# Altium PCB Assessment_2_PCB.PcbDoc (part 1 of 2)
Units mil, origin at the board's own origin, x right, y up, seen from the top; angles counter-clockwise.
Board outline 3937.01 x 2755.91 mil, 2 copper layers (Top Layer, Bottom Layer); 59 components, 57 nets, 310 pads, 181 vias.
Unrouted connection lines stored in the file: 6.
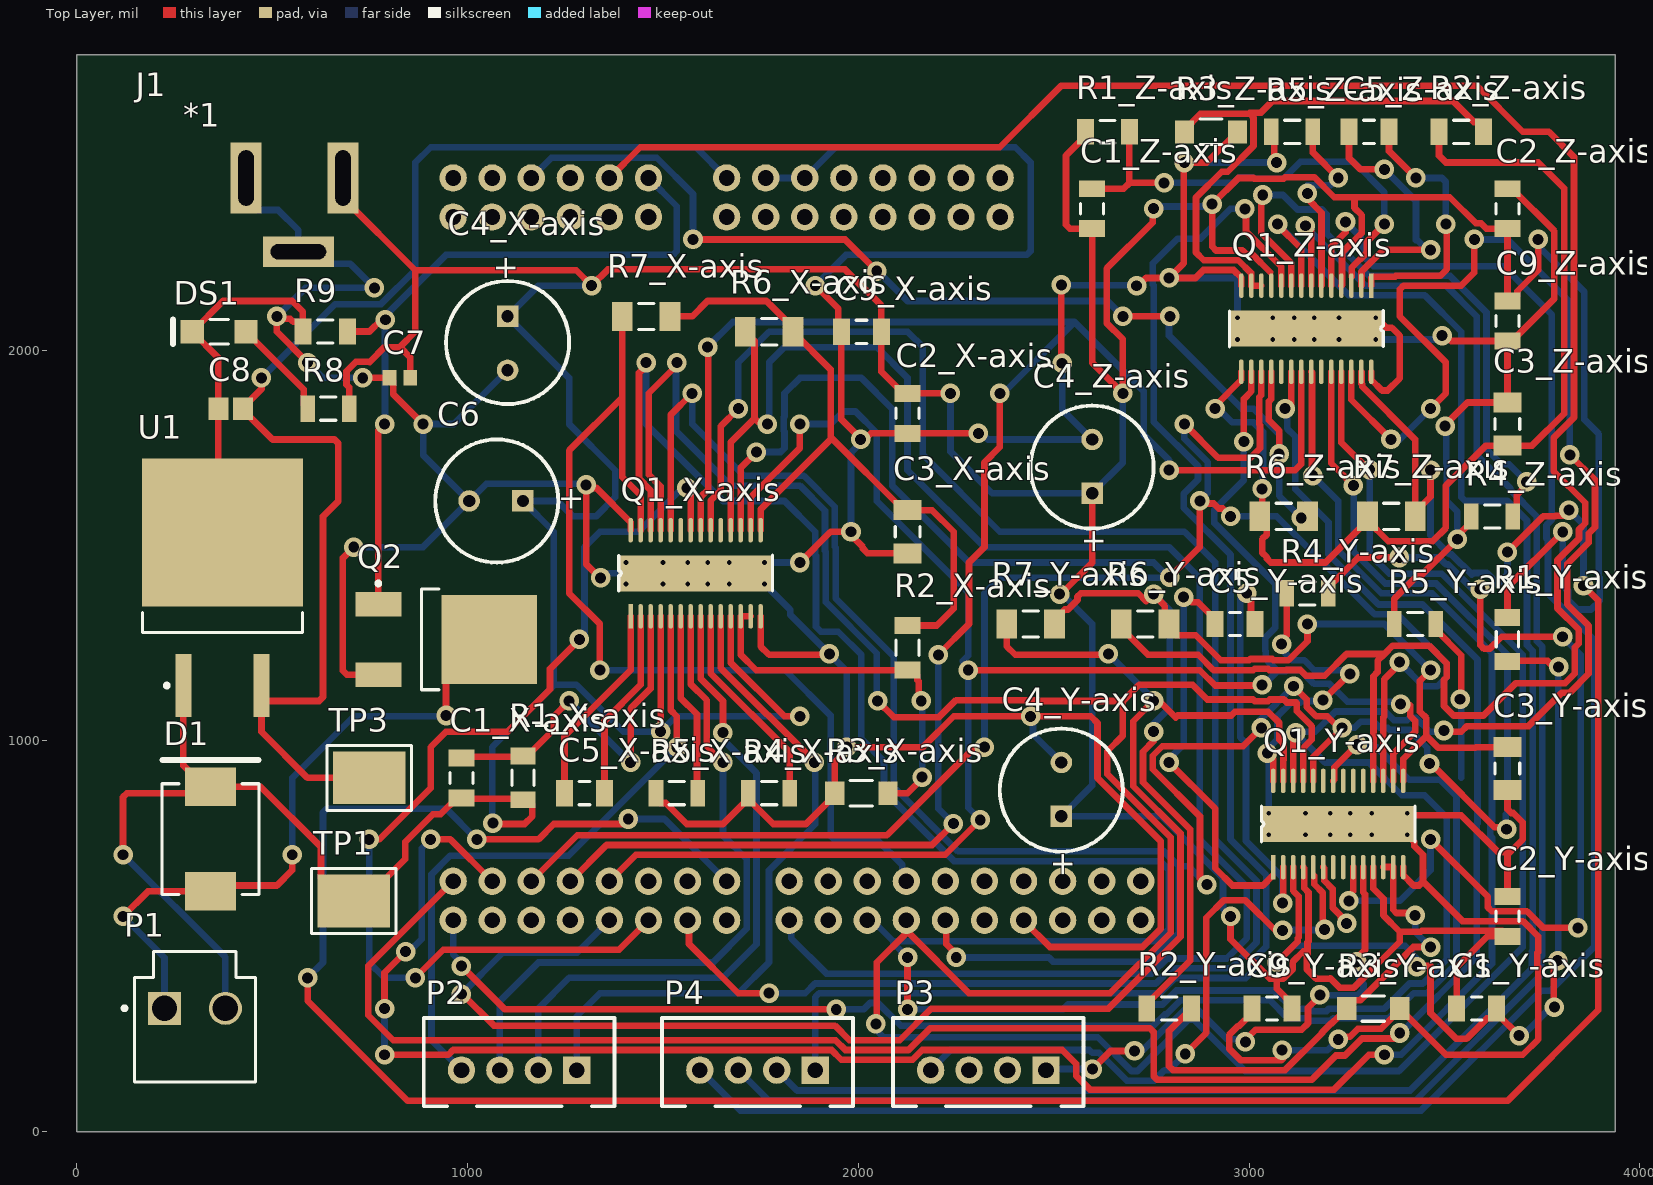
[diagram p0: Top Layer view]
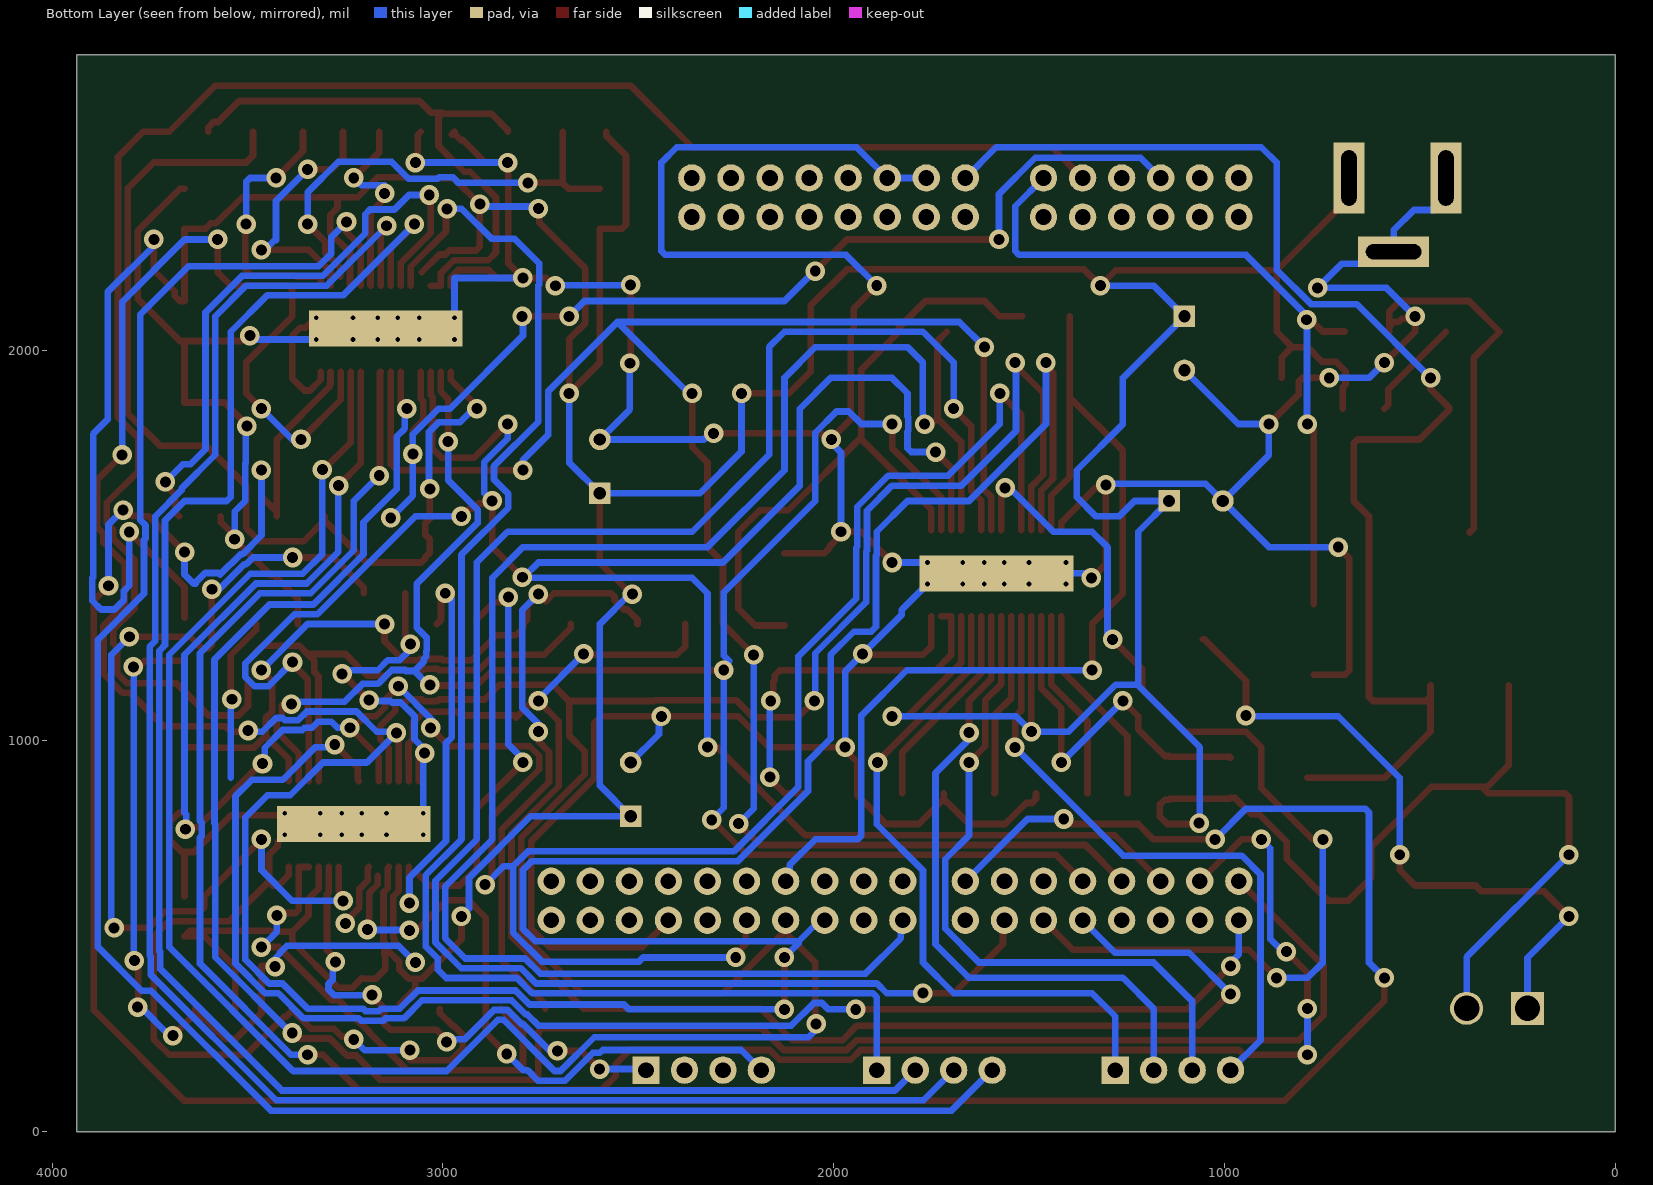
[diagram p1: Bottom Layer view, seen from below]

## Layer stack, top to bottom
Top Solder: solder mask 0.4, Solder Resist, Dk 3.5
Top Layer: signal copper 1.4
Dielectric 1: dielectric 12.6, FR-4, Dk 4.8
Bottom Layer: signal copper 1.4
Bottom Solder: solder mask 0.4, Solder Resist, Dk 3.5

## Board outline
0,0 0,2755.91 3937.01,2755.91 3937.01,0

## Design rules (kind name [scope] priority, off if disabled: settings)
Clearance [All] p1: gap=8 ignorepadtopadclearanceinfootprint=FALSE
HoleSize [All] p1: absolutevalues=TRUE maxlimit=150 minlimit=12.01 maxpercent=80.000 minpercent=20.000
PlaneClearance [All] p1: clearance=10
PolygonConnect [All] p1: connectstyle=Relief reliefconductorwidth=10 reliefentries=4 polygonreliefangle="90 Angle" airgapwidth=10
RoutingVias [All] p1: holewidth=28 width=50 viastyle="Through Hole" minholewidth=28 minwidth=50 maxholewidth=28 maxwidth=50
SolderMaskExpansion [All] p1: expansion=4 istentingtop=FALSE
Width [All] p1: maxlimit=70.87 minlimit=8 preferedwidth=10
28 further rules are at their usual default settings.

## Classes and differential pairs
channel class Stepper_Motor_IC_Circuit: X-axis Y-axis Z-axis
component class Z-axis: C1_Z-axis C2_Z-axis C3_Z-axis C4_Z-axis C5_Z-axis C9_Z-axis Q1_Z-axis R1_Z-axis R2_Z-axis R3_Z-axis R4_Z-axis R5_Z-axis R6_Z-axis R7_Z-axis
component class Y-axis: C1_Y-axis C2_Y-axis C3_Y-axis C4_Y-axis C5_Y-axis C9_Y-axis Q1_Y-axis R1_Y-axis R2_Y-axis R3_Y-axis R4_Y-axis R5_Y-axis R6_Y-axis R7_Y-axis
component class X-axis: C1_X-axis C2_X-axis C3_X-axis C4_X-axis C5_X-axis C9_X-axis Q1_X-axis R1_X-axis R2_X-axis R3_X-axis R4_X-axis R5_X-axis R6_X-axis R7_X-axis
component class Sheet_Symbol_Circuit: P2 P3 P4
component class "P_S & R": C6 C7 C8 DS1 J1 R8 TP1 TP3 U1
component class M_B_S_C: D1 P1 Q2 R9
component class K22F: *1

## Components (designator, comment, footprint, x,y, rotation, side; value= is the part's Value field where it differs from the comment)
*1 "*" FRDM-K22F 3462.99,2540.94 r180 top
C1_X-axis "C1206C103K5RACTU" KEMT-1206-2_L 984.25,905.51 r270 top (schematic designator C1)
C1_Y-axis "C1206C103K5RACTU" KEMT-1206-2_L 3582.68,314.96 r180 top (schematic designator C1)
C1_Z-axis "C1206C103K5RACTU" KEMT-1206-2_L 2598.43,2362.2 r270 top (schematic designator C1)
C2_X-axis "C1206C103K5RACTU" KEMT-1206-2_L 2125.98,1838.58 r270 top (schematic designator C2)
C2_Y-axis "C1206C103K5RACTU" KEMT-1206-2_L 3661.42,551.18 r90 top (schematic designator C2)
C2_Z-axis "C1206C103K5RACTU" KEMT-1206-2_L 3661.42,2362.2 r90 top (schematic designator C2)
C3_X-axis "1206C474K5RACTU" CAPC3216X100X50NL20T25 2125.98,1535.43 r270 top (schematic designator C3)
C3_Y-axis "1206C474K5RACTU" CAPC3216X100X50NL20T25 3661.42,929.13 r270 top (schematic designator C3)
C3_Z-axis "1206C474K5RACTU" CAPC3216X100X50NL20T25 3661.42,1811.02 r90 top (schematic designator C3)
C4_X-axis "100uF, 50V" "Capacitor radial 8mm" 1102.36,2086.61 r270 top (schematic designator C4)
C4_Y-axis "100uF, 50V" "Capacitor radial 8mm" 2519.68,807.09 r90 top (schematic designator C4)
C4_Z-axis "100uF, 50V" "Capacitor radial 8mm" 2598.43,1633.86 r90 top (schematic designator C4)
C5_X-axis "C1206C103K5RACTU" KEMT-1206-2_L 1299.21,866.14 r180 top (schematic designator C5)
C5_Y-axis "C1206C103K5RACTU" KEMT-1206-2_L 2964.57,1299.21 r180 top (schematic designator C5)
C5_Z-axis "C1206C103K5RACTU" KEMT-1206-2_L 3307.09,2559.06 r0 top (schematic designator C5)
C6 "100uF, 50V" "Capacitor radial 8mm" 1141.73,1614.17 r180 top
C7 "330nF" CAPC1608X87X35NL15T15 826.77,1929.13 r0 top
C8 "100nF" CAPC2013X88X50NL20T25 393.7,1850.39 r0 top
C9_X-axis "C1206C103K5RACTU" KEMT-1206-2_L 2007.87,2047.24 r180 top (schematic designator C9)
C9_Y-axis "C1206C103K5RACTU" KEMT-1206-2_L 3059.06,314.96 r180 top (schematic designator C9)
C9_Z-axis "C1206C103K5RACTU" KEMT-1206-2_L 3661.42,2074.8 r270 top (schematic designator C9)
D1 "S5BC-13-F" DIOD-S5xC_V 342.28,748.78 r90 top
DS1 "HSMH-C150" AVAG-HSMX-C150_V 364.17,2047.24 r180 top
J1 "Barrel Jack 5.5x2.1mm" "Barrel Jack 2.1x5.5mm THT" 141.73,2440.94 r270 top
P1 "B2P-VH(LF)(SN)" JST-B2P-VH(LF)(SN)_V 302.13,260.59 r0 top
P2 "B4B-XH-A (LF)(SN)" "B4B-XH-A (LF)(SN)" 1279.53,157.48 r180 top
P3 "B4B-XH-A (LF)(SN)" "B4B-XH-A (LF)(SN)" 2480.32,157.48 r180 top
P4 "B4B-XH-A (LF)(SN)" "B4B-XH-A (LF)(SN)" 1889.76,157.48 r180 top
Q1_X-axis "DRV8825" "DRV8825 HTSSOP"#1 1417.32,1318.9 r90 top (schematic designator Q1)
Q1_Y-axis "DRV8825" "DRV8825 HTSSOP"#2 3062.01,677.17 r90 top (schematic designator Q1)
Q1_Z-axis "DRV8825" "DRV8825 HTSSOP"#2 3312.99,2165.35 r270 top (schematic designator Q1)
Q2 "NTD6415ANLT4G" ONSC-DPAK-3-369AA-01_V 944.88,1259.84 r0 top
R1_X-axis "ERJ-8ENF1004V" RESC3216X70X50NL05T20 1141.73,905.51 r270 top (schematic designator R1)
R1_Y-axis "ERJ-8ENF1004V" RESC3216X70X50NL05T20 3661.42,1259.84 r90 top (schematic designator R1)
R1_Z-axis "ERJ-8ENF1004V" RESC3216X70X50NL05T20 2637.8,2559.06 r180 top (schematic designator R1)
R2_X-axis "51k R" RESC3216X60X45NL10T20 2125.98,1238.19 r90 top (schematic designator R2)
R2_Y-axis "51k R" RESC3216X60X45NL10T20 2795.28,314.96 r180 top (schematic designator R2)
R2_Z-axis "51k R" RESC3216X60X45NL10T20 3543.31,2559.06 r180 top (schematic designator R2)
R3_X-axis "CR1206-FX-3002ELF" FP-CR1206-MFG#1 2007.87,866.14 r0 top (schematic designator R3)
R3_Y-axis "CR1206-FX-3002ELF" FP-CR1206-MFG#2 3317.91,314.96 r180 top (schematic designator R3)
R3_Z-axis "CR1206-FX-3002ELF" FP-CR1206-MFG#2 2902.56,2559.06 r180 top (schematic designator R3)
R4_X-axis "0.2R 5% 1206(3216)" RESC1206(3216)_L 1771.65,866.14 r180 top value=0.2R (schematic designator R4)
R4_Y-axis "0.2R 5% 1206(3216)" RESC1206(3216)_L 3149.61,1377.95 r180 top value=0.2R (schematic designator R4)
R4_Z-axis "0.2R 5% 1206(3216)" RESC1206(3216)_L 3622.05,1574.8 r180 top value=0.2R (schematic designator R4)
R5_X-axis "0.2R 5% 1206(3216)" RESC1206(3216)_L 1535.43,866.14 r180 top value=0.2R (schematic designator R5)
R5_Y-axis "0.2R 5% 1206(3216)" RESC1206(3216)_L 3425.2,1299.21 r180 top value=0.2R (schematic designator R5)
R5_Z-axis "0.2R 5% 1206(3216)" RESC1206(3216)_L 3110.24,2559.06 r180 top value=0.2R (schematic designator R5)
R6_X-axis "10K 5% 1206(3216)" RESC1206(3216)_M 1771.65,2047.24 r180 top value=10kR (schematic designator R6)
R6_Y-axis "10K 5% 1206(3216)" RESC1206(3216)_M 2734.25,1299.21 r180 top value=10kR (schematic designator R6)
R6_Z-axis "10K 5% 1206(3216)" RESC1206(3216)_M 3088.58,1574.8 r0 top value=10kR (schematic designator R6)
R7_X-axis "10K 5% 1206(3216)" RESC1206(3216)_M 1456.69,2086.61 r180 top value=10kR (schematic designator R7)
R7_Y-axis "10K 5% 1206(3216)" RESC1206(3216)_M 2440.94,1299.21 r180 top value=10kR (schematic designator R7)
R7_Z-axis "10K 5% 1206(3216)" RESC1206(3216)_M 3364.17,1574.8 r0 top value=10kR (schematic designator R7)
R8 "560R 5% 1206(3216)" RESC1206(3216)_L 643.7,1850.39 r0 top value=560R
R9 "51kR" RESC3216X60X45NL10T20 635.59,2047.99 r0 top
TP1 "5016" KEYSTONE-5016_V 708.66,590.55 r0 top
TP3 "5016" KEYSTONE-5016_V 748.03,905.51 r0 top
U1 "L7805CD2T-TR" TO-263_M 372.44,1391.73 r90 top

## Footprints (in the part's own frame and the unit in brackets; to place one, negate y for a bottom-side part, rotate by r counter-clockwise, add the part's x,y. Pads: shape width x height; smd on the part's side, far side on the other; paste and mask are expansions set on the pad)
AVAG-HSMX-C150_V [mm] "SMD, 2-Leads, Body 3.2x1.6mm"
  rect 1.5x1.5 smd: 1(-1.75,0) 2(1.75,0)
  silkscreen extent -0.6,-0.8 3,0.8, body extent -1.6,-0.8 1.6,0.8, height 1.1
"B4B-XH-A (LF)(SN)" [mil] "B4B-XH-A (LF)(SN) Wire-To-Board Connector, Vertical, 2.5 mm, 4 Contacts"
  rect 70x70 hole 40: 1(0,0)
  round 70 hole 40: 2(98.43,0) 3(196.85,0) 4(295.28,0)
  silkscreen extent -96,-134 392,93, body extent -97,-134 391,92, height 276
"Barrel Jack 2.1x5.5mm THT" [mm] "GCT DCJ200-10-A-K1-K"
  rect 4.6x2 hole 1 slot 3.6 at 0 deg: 1(0,13.7) 2(0,7.4)
  rect 2x4.6 hole 1 slot 3.6 at 90 deg: 2(4.8,10.8)
  body extent -4.47,0 5.07,14.3, height 11
"Capacitor radial 8mm" [mm] "Radial electrolytic cap, 8mm body, 3.5mm pin separation"
  rect 1.4x1.4 hole 0.8: 1(0,0)
  round 1.4 hole 0.8: 2(3.5,0)
  silkscreen extent -2.3,-4 5.7,4, body extent -2.2,-4 5.8,4, height 11.5
CAPC1608X87X35NL15T15 [mm] "Chip Capacitor, 2-Leads, Body 1.60x0.80mm, IPC Medium Density"
  rect 0.9x1 smd: 1(-0.675,0) 2(0.675,0)
  body extent -0.87,-0.48 0.87,0.47, height 0.87
CAPC2013X88X50NL20T25 [mm] "Chip Capacitor, 2-Leads, Body 2.00x1.25mm, IPC Medium Density"
  rect 1.3x1.45 smd: 1(-0.8,0) 2(0.8,0)
  body extent -1.1,-0.72 1.1,0.72, height 0.88
CAPC3216X100X50NL20T25 [mm] "Chip Capacitor, 2-Leads, Body 3.20x1.60mm, IPC Medium Density"
  rect 1.3x1.8 smd: 1(-1.4,0) 2(1.4,0)
  silkscreen extent -0.35,-0.8 0.35,0.8, body extent -1.7,-0.9 1.7,0.9, height 1
DIOD-S5xC_V [mm] "Molded Diode, 2-Leads, Body 7.11x6.22mm"
  rect 2.5x3.3 smd: 1(-3.4,0) 2(3.4,0)
  silkscreen extent -3.6,-3.15 5.15,3.15, body extent -3.77,-3.11 3.77,3.11, height 2.5
"DRV8825 HTSSOP"#1 [mm]
  rect 1.6x0.3 smd: 1(0,0)
  oval 1.6x0.3 smd: 2(0,-0.65) 3(0,-1.3) 4(0,-1.95) 5(0,-2.6) 6(0,-3.25) 7(0,-3.9) 8(0,-4.55) 9(0,-5.2) 10(0,-5.85) 11(0,-6.5) 12(0,-7.15) 13(0,-7.8) 14(0,-8.45) 15(5.6,-8.45) 16(5.6,-7.8) 17(5.6,-7.15) 18(5.6,-6.5) 19(5.6,-5.85) 20(5.6,-5.2) 21(5.6,-4.55) 22(5.6,-3.9) 23(5.6,-3.25) 24(5.6,-2.6) 25(5.6,-1.95) 26(5.6,-1.3) 27(5.6,-0.65) 28(5.6,0)
  round 0.6 hole 0.3: PPAD(2.1,-2.1) PPAD(2.1,0.3) PPAD(2.1,-8.7) PPAD(2.1,-6.4) PPAD(2.1,-5) PPAD(2.1,-3.7) PPAD(3.5,-5) PPAD(3.5,-3.7) PPAD(3.5,-2.1) PPAD(3.5,0.3) PPAD(3.5,-8.7) PPAD(3.5,-6.4)
  rect 2.34x5.18 smd: PPAD(2.8,-4.225)
  rect 2.34x10 smd: PPAD(2.8,-4.225)
  rect 2.34x10 smd far side: PPAD(2.8,-4.225)
  Top Layer region: 1.1,0.9
  silkscreen extent 1.63,-9.23 3.98,0.77, body extent -0.65,-9.34 6.25,0.87, height 1.11
"DRV8825 HTSSOP"#2 [mm]
  rect 1.6x0.3 smd paste+0 mask+0.07: 1(0,0)
  oval 1.6x0.3 smd paste+0 mask+0.07: 2(0,-0.65) 3(0,-1.3) 4(0,-1.95) 5(0,-2.6) 6(0,-3.25) 7(0,-3.9) 8(0,-4.55) 9(0,-5.2) 10(0,-5.85) 11(0,-6.5) 12(0,-7.15) 13(0,-7.8) 14(0,-8.45) 15(5.6,-8.45) 16(5.6,-7.8) 17(5.6,-7.15) 18(5.6,-6.5) 19(5.6,-5.85) 20(5.6,-5.2) 21(5.6,-4.55) 22(5.6,-3.9) 23(5.6,-3.25) 24(5.6,-2.6) 25(5.6,-1.95) 26(5.6,-1.3) 27(5.6,-0.65) 28(5.6,0)
  round 0.6 hole 0.3: PPAD(2.1,-2.1) PPAD(2.1,0.3) PPAD(2.1,-8.7) PPAD(2.1,-6.4) PPAD(2.1,-5) PPAD(2.1,-3.7) PPAD(3.5,-5) PPAD(3.5,-3.7) PPAD(3.5,-2.1) PPAD(3.5,0.3) PPAD(3.5,-8.7) PPAD(3.5,-6.4)
  rect 2.34x5.18 smd paste+0: PPAD(2.8,-4.225)
  rect 2.34x10 smd paste-100 mask-100: PPAD(2.8,-4.225)
  rect 2.34x10 smd far side paste-100 mask-100: PPAD(2.8,-4.225)
  Top Layer region: 1.1,0.9
  silkscreen extent 1.63,-9.23 3.98,0.77, body extent -0.65,-9.34 6.25,0.87, height 1.11
FP-CR1206-MFG#1 [mm]
  rect 1.25x1.5 smd: 1(-1.725,0) 2(1.725,0)
  silkscreen extent -0.72,-0.82 0.72,0.82, body extent -2.45,-0.92 2.45,0.92, height 0.25
FP-CR1206-MFG#2 [mm]
  rect 1.25x1.5 smd paste+0 mask+0: 1(-1.725,0) 2(1.725,0)
  silkscreen extent -0.72,-0.82 0.72,0.82, body extent -2.45,-0.92 2.45,0.92, height 0.25
FRDM-K22F [mil] "NXP FRDM-K22F development board"
  round 70 hole 40: J1_1(2500,1900) J1_2(2500,2000) J1_3(2400,1900) J1_4(2400,2000) J1_5(2300,1900) J1_6(2300,2000) J1_7(2200,1900) J1_8(2200,2000) J1_9(2100,1900) J1_10(2100,2000) J1_11(2000,1900) J1_12(2000,2000) J1_13(1900,1900) J1_14(1900,2000) J1_15(1800,1900) J1_16(1800,2000) J2_1(1640,1900) J2_2(1640,2000) J2_3(1540,1900) J2_4(1540,2000) J2_5(1440,1900) J2_6(1440,2000) J2_7(1340,1900) J2_8(1340,2000) J2_9(1240,1900) J2_10(1240,2000) J2_11(1140,1900) J2_12(1140,2000) J2_13(1040,1900) J2_14(1040,2000) J2_15(940,1900) J2_16(940,2000) J2_17(840,1900) J2_18(840,2000) J2_19(740,1900) J2_20(740,2000) J24_1(2000,200) J24_2(2000,100) J24_3(2100,200) J24_4(2100,100) J24_5(2200,200) J24_6(2200,100) J24_7(2300,200) J24_8(2300,100) J24_9(2400,200) J24_10(2400,100) J24_11(2500,200) J24_12(2500,100) J25_1(1100,200) J25_2(1100,100) J25_3(1200,200) J25_4(1200,100) J25_5(1300,200) J25_6(1300,100) J25_7(1400,200) J25_8(1400,100) J25_9(1500,200) J25_10(1500,100) J25_11(1600,200) J25_12(1600,100) J25_13(1700,200) J25_14(1700,100) J25_15(1800,200) J25_16(1800,100)
  body extent 690,50 2550,2050, height 335
JST-B2P-VH(LF)(SN)_V [mm] "THD, 2-Leads, Body 8.5x7.86mm, Pitch 3.96mm"
  rect 2.15x2.15 hole 1.65: 1(-1.98,1.4)
  round 2.15 hole 1.65: 2(1.98,1.4)
  silkscreen extent -4.7,-3.4 3.93,5.1, body extent -3.93,-3.2 3.93,5.3, height 10.9
KEMT-1206-2_L [mm] "SMD, 2-Leads, Body 3.4x1.8mm, IPC High Density"
  rect 1.1x1.7 smd: 1(-1.3,0) 2(1.3,0)
  silkscreen extent -0.35,-0.75 0.35,0.75, body extent -1.7,-0.9 1.7,0.9, height 0.88
KEYSTONE-5016_V [mm] "Testpoint, Body 3.81x2.04 mm"
  rect 4.7x3.43 smd: 1(0,0)
  silkscreen extent -2.75,-2.12 2.75,2.11, body extent -1.9,-1.02 1.9,1.02, height 2.29
ONSC-DPAK-3-369AA-01_V [mm] "DPAK, 3-Leads, Body 6.54x6.095mm, Pitch 2.29mm"
  rect 3x1.6 smd: 1(-4.4,2.29) 3(-4.4,-2.29)
  rect 6.2x5.8 smd: 4(2.8,0)
  silkscreen extent -4.52,-3.27 -0.45,3.76, body extent -1.6,-3.27 4.49,3.27, height 2.47
RESC1206(3216)_L [mm] "Chip Resistor, Body 3.2x1.6mm, IPC High Density"
  rect 0.95x1.7 smd: 1(-1.35,0) 2(1.35,0)
  silkscreen extent -0.5,-0.75 0.5,0.75, body extent -1.67,-0.87 1.67,0.87, height 0.75
RESC1206(3216)_M [mm] "Chip Resistor, Body 3.2x1.6mm, IPC Low Density"
  rect 1.35x1.9 smd: 1(-1.55,0) 2(1.55,0)
  silkscreen extent -0.5,-0.85 0.5,0.85, body extent -1.67,-0.87 1.67,0.87, height 0.75
RESC3216X60X45NL10T20 [mm] "Chip Resistor, 2-Leads, Body 3.20x1.60mm, IPC Medium Density"
  rect 1.1x1.7 smd: 1(-1.45,0) 2(1.45,0)
  silkscreen extent -0.5,-0.75 0.5,0.75, body extent -1.65,-0.85 1.65,0.85, height 0.6
RESC3216X70X50NL05T20 [mm] "Chip Resistor, 2-Leads, Body 3.20x1.60mm, IPC Medium Density"
  rect 1.1x1.65 smd: 1(-1.425,0) 2(1.425,0)
  silkscreen extent -0.5,-0.72 0.5,0.72, body extent -1.63,-0.82 1.62,0.82, height 0.7
TO-263_M [mm] "D2-PAK, 4-Leads, Body 9.2x10.2mm, Pitch 2.54mm, Lead Span 15.4mm, IPC Low Density"
  rect 4.1x1.05 smd: 1(-6.35,2.54) 3(-6.35,-2.54)
  rect 9.6x10.45 smd: 4(3.6,0)
  silkscreen extent -6.47,-5.2 -1.6,5.2, body extent -2.9,-5.2 6.45,5.2, height 4.6

## Part data
*1: library part "NXP FRDM-K22F"
C1_X-axis C1_Y-axis C1_Z-axis C2_X-axis C2_Y-axis C2_Z-axis C9_X-axis C9_Y-axis C9_Z-axis: library part CMP-2000-06008-1, "Surface Mount Multilayer Ceramic Chip Capacitor, X7R Dielectric, 50 V, -55 to 125 degC, 2-Pin SMD (1206), RoHS, Tape and Reel", Capacitance=0.1uF, Case Size=1206(3216mm), Manufacturer=Kemet, Package Description="2-Leads SMD, Body 3.2 x 1.6 mm", Package Reference=1206-2, Temperature Coefficient=X7R, Tolerance=10%, Voltage Rating=50V, Brand/Series=CSeries, Datasheet URL=https://datasheet.ciiva.com/7729/1725435-7729792.pdf, Datasheet Version=07/2013, Dimensions="0.126\"x0.063\"(3.2x1.6mm)LxW", Manufacturer URL=http://www.kemet.com/, Material, Element=Ceramic, Mounting Technology=SurfaceMount, Mounting Type=PCB, Termination=SMD
C3_X-axis C3_Y-axis C3_Z-axis: library part CMP-2000-06016-1, "Chip Capacitor, 470 nF, +/- 10%, 50 V, -55 to 125 degC, 1206 (3216 Metric), RoHS, Tape and Reel", Capacitance - nF=470nF, Capacitance - pF=470000pF, Case Code - in=1206, Case Code - mm=3216, Case Height=0.9mm, Case Length=3.2mm, Case Width=1.6mm, Dielectric=X7R, Manufacturer=Kemet, Maximum Operating Temperature=+125C, Minimum Operating Temperature=-55C, Operating Temperature Range=-55Cto+125C, Package / Case=1206(3216metric), Package Description="2-Pin Surface Mount Device, Body 3.2 x 1.6 mm", Temperature Coefficient / Code=+/-15%, Tolerance=10%, Voltage Rating=50V, Brand=Kemet, Class=2, Datasheet URL=http://www.kemet.com/docfinder?Partnumber=C1206C106K8RACTU, Datasheet Version=02/2016, Dimensions=1.6mmWx3.2mmLx0.9mmH, Factory Pack Quantity=4000, Manufacturer URL=http://www.kemet.com/, Mounting Technology=SurfaceMount, Package Reference=1206, Packaging=Reel, Product=GeneralTypeMLCCs, Product Category=MultilayerCeramicCapacitorsMLCC-SMD/SMT, RoHS=Details, Series=C1206C, Termination Style=SMD/SMT, Type=SMDMLCCsX7R,Commercial, Voltage Rating DC=50V
C4_X-axis C4_Y-axis C4_Z-axis C6: library part "Cap 100uF, 50V, THT radial", "Electrolytic Capacitor, 100 µF, 50 V, ± 20%, Radial Leaded, 8 mm"
C5_X-axis C5_Y-axis C5_Z-axis: library part CMP-2000-06008-1, "Surface Mount Multilayer Ceramic Chip Capacitor, X7R Dielectric, 50 V, -55 to 125 degC, 2-Pin SMD (1206), RoHS, Tape and Reel", Capacitance=0.01uF, Case Size=1206(3216mm), Manufacturer=Kemet, Package Description="2-Leads SMD, Body 3.2 x 1.6 mm", Package Reference=1206-2, Temperature Coefficient=X7R, Tolerance=10%, Voltage Rating=50V, Brand/Series=CSeries, Datasheet URL=https://datasheet.ciiva.com/7729/1725435-7729792.pdf, Datasheet Version=07/2013, Dimensions="0.126\"x0.063\"(3.2x1.6mm)LxW", Manufacturer URL=http://www.kemet.com/, Material, Element=Ceramic, Mounting Technology=SurfaceMount, Mounting Type=PCB, Termination=SMD
C7: library part CMP-2006-03186-1, "C0603C334K4RACTU", Manufacturer=Kemet, Part Number=C0603C334K4RACTU
C8: library part CMP-2007-00279-1, "C0805C104K5RACTU", Manufacturer=Kemet, Part Number=C0805C104K5RACTU
D1: library part CMP-2000-07025-1, "Surface Mount Glass Passivated Rectifier, 5 A, 100 V, -65 to 150 degC, 2-Pin SMC, RoHS, Tape and Reel", Average Rectified Current-Max=5A, Forward Voltage=1.15V, Manufacturer="Diodes Inc", Package Description="2-Pin Molded Component, Body 6.855 x 5.905 mm", Package Reference=S5xC, Peak Current-Max=100A, Reverse Current-Max=10µA, Reverse Voltage-Max [Vrrm]=100V, Datasheet URL=http://www.diodes.com/_files/datasheets/ds16007.pdf, Datasheet Version="Rev. 9-2, 09/2010", Manufacturer URL=http://www.diodes.com/, Mounting Technology=SurfaceMount
DS1: library part CMP-2000-06426-1, "LED Uni-Color Red, 65 mW, 25 mA, -40 to 85 degC, 2-Pin SMD, RoHS, Tape and Reel", Emitting Color=Red, Forward Current=25mA, Forward Voltage=2.6V, Manufacturer=Avago, Operating Temp Range=-40Cto85C, Operating Temperature Classification=Industrial, Package Description="2-Pin Surface Mount Device, Body 3.2 x 1.6 mm", Package Reference=HSMX-C150, Package Type=ChipLed, Power Dissipation=78W, Reverse Voltage=5V, Test Current (It)=20mA, Chip Material=GaAlAs, Datasheet URL=http://media.digikey.com/pdf/Data%20Sheets/Avago%20PDFs/HSMz-Czzz.pdf, Datasheet Version=03/2012, DELETED=Compliant, Dominant Wave Length=639nm, High Brightness=No, Lens Dimensions=2x1.6x0.6mm, Lens Type=ColorlessDiffused, Lum Intensity=17mcd, Luminous Intensity=17mcd, Main Category=ChipLED, Manufacturer URL=http://www.avagotech.com/, Mounting=SurfaceMount, Mounting Technology=SurfaceMount, Number of  Elements=1, Packaging=TapeandReel, Peak Wavelength=660nm, Pin Count=2, Product Depth (mm)=1.6mm, Product Height (mm)=1.1mm, Product Length (mm)=3.2mm, Rad Hardened=No, Shape Type=Rectangular, Type=Uni-Color, Viewing Angle=170deg
J1: "GCT DCJ200-10-A-K1-K"
P1: library part CMP-1755-00002-1, "Male Header, Pitch 3.96 mm, 1 x 2 Position, Height 10.9 mm, Tail Length 3.7 mm, -25 to 85 degC, RoHS, Bulk", Capacitance="27 pF", Case Code (Imperial)=0603, Case Code (Metric)=1608, Max Operating Temperature=125degC, Min Operating Temperature=-55degC, Package Quantity=4000, Resistance="100000000000 Ohm", Tolerance=5%, Type (Capacitors)=C0G, Voltage Rating="50 V", Case/Package=0603, ComponentLink1Description="Manufacturer URL", ComponentLink1URL=http://www.jst.com/home2.html, ComponentLink2Description=Datasheet, ComponentLink2URL=http://www.jst-mfg.com/product/pdf/eng/eVH.pdf, DatasheetVersion=May-16, Height="0.8 mm", Length="1.6 mm", Mount="Surface Mount", PackageDescription="Male Header, Pitch 3.96 mm, 1 x 2 Position, Height 10.9 mm, Tail Length 3.7 mm", PackageReference=B2P-VH(LF)(SN), Packaging="Tape and Reel", Pins=2, Radiation Hardening=No, REACH SVHC="No SVHC", RoHSCompliant=True, Voltage Rating (DC)="50 V", Width="0.8 mm"
P2 P3 P4: library part "B4B-XH-A (LF)(SN) Wire-to-board connector", "Wire-to-board connector, vertical, 2.5mm, 4 contacts"
Q1_X-axis Q1_Y-axis Q1_Z-axis: library part "Stepper motor driver DRV8824", "TI DRV8825 Stepper Motor Controller IC"
Q2: library part CMP-1058-00352-1, "N-Channel Power MOSFET, 100 V, 23 A, 56 mOhm, 3-Pin DPAK, Pb-Free, Tape and Reel", Manufacturer="On Semiconductor", Package Type=DPAK-3, Channel Polarity="N Channel", Ciss Typ (pF)=1024, ComponentLink1Description="Manufacturer URL", ComponentLink1URL=http://www.onsemi.com/, ComponentLink2Description=Datasheet, ComponentLink2URL=http://www.onsemi.cn/pub_link/Collateral/NTD6415ANL-D.PDF, ComponentLink3Description="Package Specification", ComponentLink3URL=http://www.onsemi.cn/pub_link/Collateral/369AA.PDF, Configuration=Single, Coss Typ (pF)=156, Crss Typ (pF)=70, DatasheetVersion="Rev. 1", ID Max (A)=23, Mounting Technology="Surface Mount", PackageDescription="3-Pin Flange Mount, Body 6.54 x 6.095 mm, Pitch 2.29 mm", PackageReference=DPAK-3-369AA-01, PackageVersion="Rev. B, 06/2010", Packing="Tape and Reel", PartNumber=NTD6415ANLT4G, PD Max (W)=83, Qrr Typ (nC)=152, RoHS=Pb-Free, VGS Max (V)=20, VGS(th) Max (V)=2
R1_X-axis R1_Y-axis R1_Z-axis: library part CMP-2003-00020-1, Manufacturer=Panasonic, Resistance=1MR, Part Number=ERJ-8ENF1004V
R2_X-axis R2_Y-axis R2_Z-axis R9: library part CMP-2003-02261-1, "CRCW120651K0JNEA", Manufacturer="Vishay Dale", Part Number=CRCW120651K0JNEA
R3_X-axis R3_Y-axis R3_Z-axis: library part CMP-07231-000998-1, "Thick Film Chip Resistors 1206 30kΩ 0.25W 1% 100ppm/°C", Case Code (Imperial)=1206, Case Code (Metric)=3216, Max Operating Temperature=155°C, Max Power Dissipation=250mW, Min Operating Temperature=-55°C, Package Quantity=5000, Resistance=30kR, Temperature Coefficient=100ppm/°C, Tolerance=1%, Voltage Rating=200V, Case/Package=1206, Composition="Thick Film", Contact Plating=Tin, Depth=1.6mm, Height=0.03inch, Length=3.2mm, Military Standard=Not, Mount="Surface Mount", Number of Terminations=2, Packaging="Tape and Reel", Power Rating=250mW, Radiation Hardening=No, Termination=SMD/SMT, Thickness=610um, Width=1.6mm
R4_X-axis R4_Y-axis R4_Z-axis R5_X-axis R5_Y-axis R5_Z-axis: library part CMP-1014-00057-1, "0.2R 0.25W 5% 1206 (3216 Metric)  SMD", Case-EIA=1206, Case-Metric=3216, Power="0.25 W", Tolerance="5 %", Technology=SMT
R6_X-axis R6_Y-axis R6_Z-axis R7_X-axis R7_Y-axis R7_Z-axis: library part CMP-1014-00098-1, "10K 0.25W 5% 1206 (3216 Metric)  SMD", Case-EIA=1206, Case-Metric=3216, Power="0.25 W", Tolerance="5 %", Technology=SMT
R8: library part CMP-1014-00068-1, "560R 0.25W 5% 1206 (3216 Metric)  SMD", Case-EIA=1206, Case-Metric=3216, Power="0.25 W", Tolerance="5 %", Technology=SMT
TP1 TP3: library part CMP-2000-05178-1, "Test Point, 1-Pin SMT, RoHS, Tape and Reel", Manufacturer=Keystone, Package Description="1-Pin Test Point, Body 3.81 x 2.04 mm", Standard Package=1, Catalog Drawings="5016Top /  / 5016Side /  / 5016Front", Category=TestandMeasurement, Datasheet URL=https://ciiva.com/datasheet-click-2917613?src=ciiva&sig=4a4e90f, Datasheet Version="Rev. D, 03/2014", Family=TestPoints, Featured Product="SurfaceMountTestPoints /  / 5019MiniatureSurfaceMountTestPoint", Manufacturer URL=http://www.keyelco.com/, Material=PhosphorBronze, Mounting Type=SurfaceMount, Online Catalog=SurfaceMountTestPoints, Other Names=5016KDKR, Package Reference=5016, Packaging=Digi-Reel, RoHS Information=RoHSComplianceStatement, Terminal="0.015\"(0.38mm)PhosphorBronze,SilverPlated", Type=PCTestPoint,Compact
U1: library part CMP-0244-00213-1, "Positive Voltage Regulator, 3-Pin D2PAK, Tape and Reel", ComponentLink1Description="Manufacturer URL", ComponentLink1URL=http://www.st.com, ComponentLink2Description=Datasheet, ComponentLink2URL=http://www.st.com/internet/com/TECHNICAL_RESOURCES/TECHNICAL_LITERATURE/DATASHEET/CD00000444.pdf, DatasheetVersion=16/11/2011, PackageDescription="3-Pin Transistor Outline Package 2.54 mm Pitch, 15.4 mm Lead Span (D2PAK)", PackageReference=TO-263, PackageVersion=2011

## Via types
v1: diameter 50, hole 28, Top Layer to Bottom Layer, 181 vias

## Nets (pads, with @x,y where several pads share a name; then routed paths per layer and width w, separated by ;. In a path a pad name is that pad's centre, name@x,y a point inside that pad or via, vN(x,y) a via of type N, cw(c..) or ccw(c..) an arc to the next point about the centre after c; other vN are vias at no path point)
DIR_1: *1.J1_14 Q1_X-axis.20 | length 4754.5
  Top Layer w17: *1.J1_14@1562.99,540.94 1566.8,537.14 1566.8,480.44 1692.91,354.33 v1(1771.65,354.33) ; Q1_X-axis.20@1622.05,1539.37 1622.05,1614.66 1648.23,1640.84 1648.23,1805.71 v1(1692.91,1850.39)
  Bottom Layer w17: v1(1692.91,1850.39) 1692.91,1968.5 1771.65,2047.24 2125.98,2047.24 2165.35,2007.87 2165.35,1732.28 2362.2,1535.43 2834.65,1535.43 2913.39,1456.69 2913.39,748.03 3019.26,642.16 3019.26,484.27 2953.26,418.27 2800.55,418.27 2761.61,379.33 1889.37,379.33 1864.37,354.33 v1(1771.65,354.33)
DIR_2: *1.J1_4 Q1_Y-axis.20
DIR_3: *1.J1_1 Q1_Z-axis.20 | length 5359.8
  Top Layer w17: *1.J1_1@962.99,640.94 745.9,423.85 745.9,297.77 809.69,233.98 1941.95,233.98 1966.84,209.09 2128.46,209.09 2184.37,265 2745.95,265 2755.91,255.04 2755.91,142.44 2765.86,132.48 3159.96,132.48 3222.2,194.72 3245.54,194.72 3289.17,238.35 3371.74,238.35 v1(3385.83,252.43) ; v1(3092.36,1850.39) 3098.31,1850.39 3108.27,1860.35 Q1_Z-axis.20@3108.27,1944.88
  Bottom Layer w17: v1(3092.36,1850.39) 3097.55,1845.21 3097.55,1799.89 3118.76,1778.68 3118.76,1644.29 3203.35,1559.7 3203.35,1477.68 3331.81,1349.21 3443.98,1349.21 3584.81,1208.38 3584.81,789.53 3582.68,787.4 3582.68,446.37 3388.74,252.43 v1(3385.83,252.43)
ENABLE: *1.J1_7 Q1_X-axis.21 Q1_Y-axis.21 Q1_Z-axis.21 | length 5007.6
  Top Layer w17: *1.J1_7@1262.99,640.94 1355.71,733.66 2188.9,733.66 v1(2243.37,788.13) ; Q1_X-axis.21@1596.46,1539.37 1596.46,1624.42 1616.3,1644.27 1616.3,2005.74 v1(1614.17,2007.87) ; v1(2204.72,1220.47) 2283.46,1299.21 2283.46,1456.69 2322.83,1496.06 2322.83,1712.6 2362.2,1751.97 v1(2362.2,1889.76) ; v1(2795.28,1692.91) 3118.11,1692.91 3133.86,1708.66 Q1_Z-axis.21@3133.86,1944.88
  Bottom Layer w17: v1(1614.17,2007.87) 1678.54,2072.24 2553.37,2072.24 ; v1(2204.72,1220.47) 2204.72,826.77 v1(2243.37,788.13) ; v1(2362.2,1889.76) 2362.2,1881.07 2553.37,2072.24 ; v1(2795.28,1692.91) 2795.28,1718.74 2730.91,1783.11 2730.91,1894.71 2553.37,2072.24
FAULT_X: *1.J2_2 Q1_X-axis.18 R6_X-axis.2 | length 4508.1
  Top Layer w17: Q1_X-axis.18@1673.23,1539.37 1673.23,1764.21 1734.41,1825.39 ; R6_X-axis.2@1710.63,2047.24 1734.41,2023.46 1734.41,1825.39 ; v1(1767.39,1811.02) 1768.46,1812.09 1763.21,1817.34 1742.47,1817.34 1734.41,1825.39
  Bottom Layer w17: v1(1767.39,1811.02) 1769.52,1811.02 1771.65,1813.15 1771.65,1968.5 1811.02,2007.87 2047.24,2007.87 2125.98,1929.13 2125.98,1692.91 2322.83,1496.06 2795.28,1496.06 2874.02,1417.32 2874.02,748.03 2994.26,627.79 2994.26,494.62 2942.9,443.27 2790.19,443.27 2751.25,404.33 1918.5,404.33 1828.22,494.61 1828.22,535.72 *1.J2_2@1822.99,540.94
FAULT_Y: *1.J24_4 Q1_Y-axis.18 R6_Y-axis.2 | length 5861.7
  Top Layer w17: *1.J24_4@1362.99,2440.94 1441.73,2519.68 2362.2,2519.68 2519.69,2677.17 3582.68,2677.17 3700.79,2559.06 3767.44,2559.06 3831.66,2494.84 3831.66,1827.8 3779.53,1775.67 3779.53,1690.39 3860.4,1609.52 3860.4,1557.25 3844.47,1541.33 3844.47,1517.99 3789.64,1463.15 3789.64,1339.04 3843.9,1284.78 3843.9,1249.49 3833.79,1239.38 3833.79,1172.36 3809.48,1148.05 3683.2,1148.05 3600.27,1065.12 3523.26,1065.12 3498.95,1089.43 3498.95,1156.06 3506.07,1163.18 3506.07,1198.29 3460.44,1243.92 3367.77,1243.92 3346.46,1222.6 ; R6_Y-axis.2@2673.23,1299.21 2673.23,1288.39 2741.14,1220.47 2870,1220.47 2909.37,1181.1 3010.59,1181.1 3014.31,1184.82 3048.69,1184.82 3052.41,1181.1 3096.61,1181.1 3096.9,1181.39 3131.28,1181.39 3145.93,1166.73 3193.93,1166.73 3249.8,1222.6 3346.46,1222.6 ; Q1_Y-axis.18@3317.91,897.64 3317.91,972.62 3318.5,973.21 3318.5,1165.64 3329.22,1176.35 3329.22,1205.36 3346.46,1222.6
FAULT_Z: *1.J24_8 Q1_Z-axis.18 R6_Z-axis.2 | length 2809.6
  Top Layer w17: v1(1576.93,2283.46) 1966.37,2283.46 v1(2047.24,2202.59) ; v1(2677.17,2086.61) v1(2797.41,2086.61) ; Q1_Z-axis.18@3057.09,1944.88 3057.09,1875.19 3050.86,1868.96 3050.86,1820.68 3077.26,1794.29 v1(3077.26,1734.41) ; v1(3133.66,1570.69) 3145.5,1570.69 R6_Z-axis.2@3149.61,1574.8
  Bottom Layer w17: *1.J24_8@1162.99,2440.94 1214.49,2492.44 1484.32,2492.44 1576.93,2399.84 1576.93,2287.72 1574.8,2285.59 v1(1576.93,2283.46) ; v1(2047.24,2202.59) 2049.37,2202.59 2125.98,2125.98 2637.8,2125.98 v1(2677.17,2086.61) ; v1(2797.41,2086.61) 2795.28,2084.48 2795.28,2037.34 2982.22,1850.39 3011.69,1850.39 3077.17,1784.91 3077.17,1734.5 v1(3077.26,1734.41) 3077.26,1627.1 v1(3133.66,1570.69)
GND: *1.J2_14 *1.J25_12 *1.J25_14 C2_X-axis.2 C2_Y-axis.2 C2_Z-axis.2 C3_X-axis.2 C3_Y-axis.2 C3_Z-axis.2 C4_X-axis.2 C4_Y-axis.2 C4_Z-axis.2 C6.2 C7.1 C8.1 C9_X-axis.2 C9_Y-axis.2 C9_Z-axis.2 DS1.2 J1.2 Q1_X-axis.14 Q1_X-axis.28 Q1_X-axis.PPAD Q1_Y-axis.14 Q1_Y-axis.28 Q1_Y-axis.PPAD Q1_Z-axis.14 Q1_Z-axis.28 Q1_Z-axis.PPAD Q2.3 R3_X-axis.1 R3_Y-axis.1 R3_Z-axis.1 R4_X-axis.2 R4_Y-axis.2 R4_Z-axis.2 R5_X-axis.2 R5_Y-axis.2 R5_Z-axis.2 R9.1 U1.4 | length 19001.4
  Top Layer w17: U1.4@372.44,1533.46 362.2,1543.7 C8.1@362.2,1850.39 362.2,1980.32 DS1.2@295.28,2047.24 374.02,2125.98 551.18,2125.98 578.5,2098.66 R9.1@578.5,2059.8 ; R9.1@578.5,2047.99 R9.1@578.5,2059.8 ; v1(590.55,1968.5) 511.81,2047.24 v1(511.81,2086.61) 518.13,2080.3 546.2,2080.3 553.54,2072.96 565.35,2072.96 R9.1@578.5,2059.8 ; v1(708.66,1496.06) 680.71,1468.11 680.71,1179.64 690.67,1169.68 Q2.3@771.65,1169.68 ; v1(731.69,1929.13) C7.1@800.2,1929.13 809.41,1919.92 809.41,1887.89 v1(886.28,1811.02) ; v1(1340.71,1417.32) 1338.58,1417.32 1303.34,1452.56 v1(1303.34,1655.47) 1311.58,1647.23 1329.87,1647.23 1417.32,1559.77 Q1_X-axis.28@1417.32,1539.37 ; R5_X-axis.2@1482.28,866.14 1482.28,851.38 1492.48,841.18 1507.25,841.18 1561.02,787.4 1653.54,787.4 1707.32,841.18 1708.3,841.18 R4_X-axis.2@1718.5,851.38 ; R4_X-axis.2@1718.5,866.14 R4_X-axis.2@1718.5,851.38 ; Q1_X-axis.14@1750,1318.9 1750,1242.13 1771.65,1220.47 1926.18,1220.47 v1(1926.18,1222.6) ; v1(1850.39,1456.69) 1929.13,1535.43 v1(1981.26,1535.43) 1981.26,1526.5 2011.6,1496.17 2011.6,1492.34 2023.62,1480.32 C3_X-axis.2@2125.98,1480.32 ; v1(1889.76,2165.35) 1948.91,2106.21 1948.91,2055.03 C9_X-axis.2@1956.69,2047.24 1956.69,1822.83 2005.74,1773.78 v1(2005.74,1771.65) ; v1@2007.87,1771.65 2016.8,1771.65 2032.55,1787.4 C2_X-axis.2@2125.98,1787.4 v1(2307.09,1787.4) ; *1.J2_14@2422.99,540.94 2422.99,539.72 2490.27,472.44 2727.32,472.44 2774.49,519.61 2774.49,742.64 2612.13,905.01 2612.13,1045.99 2595.12,1062.99 v1(2440.94,1062.99) 2244.09,1062.99 2165.35,984.25 v1(1970.63,984.25) 1970.63,977.45 1939.96,946.78 R3_X-axis.1@1939.96,866.14 1939.96,861.22 1866.14,787.4 1782.48,787.4 R4_X-axis.2@1718.5,851.38 ; v1(2519.68,2167.48) 2519.68,1968.5 v1(2521.59,1966.6) ; C4_Z-axis.2@2588.11,1771.65 C4_Z-axis.2@2598.43,1771.65 ; v1(2712.37,2165.07) 2716.26,2165.07 2736.22,2185.04 v1(2795.28,2185.04) ; R3_Z-axis.1@2977.72,2551.81 R3_Z-axis.1@2970.47,2559.06 2970.47,2554.14 2954.36,2538.03 2949.44,2538.03 2891.73,2480.32 v1(2834.65,2480.32) 2832.52,2478.18 2832.52,2222.28 v1(2795.28,2185.04) ; Q1_Z-axis.14@2980.31,2165.35 2980.31,2185.76 2960.72,2205.35 2883.23,2205.35 2862.92,2185.04 v1(2795.28,2185.04) ; C9_Y-axis.2@3007.87,314.96 3007.87,303.15 2976.06,271.33 2973.5,271.33 2949.19,247.02 2949.19,212.64 2979.35,182.48 3082.17,182.48 3096.54,196.85 v1(3084.87,208.52) ; v1(3046.75,969) 3062.01,953.74 Q1_Y-axis.28@3062.01,897.64 ; R5_Z-axis.2@3057.09,2559.06 3064.55,2551.59 3064.55,2486.63 v1(3070.87,2480.32) ; R4_Y-axis.2@3096.46,1377.95 3096.46,1269.81 3083.47,1256.82 v1(3083.47,1247.89) 3097.55,1247.89 v1@3098.41,1247.03 ; v1(3188.98,1104.49) 3190.04,1104.49 3256.99,1171.44 v1(3258.06,1171.44) ; v1(3228.35,236.22) 3234.66,242.53 3258,242.53 3278.81,263.35 3338.05,263.35 3368.64,293.93 3369.72,293.93 3385.83,310.04 3401.93,293.93 3406.85,293.93 3503.94,196.85 3700.79,196.85 3740.16,236.22 3740.16,421.24 3738.03,423.37 3738.03,457.75 3740.16,459.88 3740.16,499.71 3700.93,538.94 3546.51,538.94 3445.36,640.09 ; Q1_Y-axis.PPAD@3228.35,787.4 3250.53,809.58 3258.86,809.58 3313.98,809.58 3404.53,809.58 3543.31,809.58 3637.19,715.7 3661.42,715.7 3668.46,715.7 ; Q1_Z-axis.28@3312.99,1944.88 3312.99,1924.48 3340.67,1896.81 3354.75,1896.81 3385.83,1927.88 3385.83,2037.29 3365.74,2057.37 3351.9,2057.37 3326.6,2082.68 Q1_Z-axis.PPAD@3324.8,2082.68 ; R5_Y-axis.2@3372.05,1299.21 3372.05,1364.17 3432.49,1424.62 3441.86,1424.62 v1(3533.42,1516.19) ; Q1_Y-axis.14@3394.69,677.17 3394.69,656.76 3421.32,630.13 3435.41,630.13 3445.36,640.09 ; Q1_Y-axis.PPAD@3404.53,759.84 3423.07,741.3 3423.07,730.84 3445.36,708.54 3445.36,640.09 ; v1(3494.28,2037.58) 3503.21,2037.58 3517.17,2023.62 C9_Z-axis.2@3661.42,2023.62 ; v1(3501.81,1805.93) 3501.81,1811.02 3503.94,1811.02 3559.06,1866.14 C3_Z-axis.2@3661.42,1866.14 C9_Z-axis.2@3661.42,2023.62 ; v1@3529.23,1520.38 3568.9,1560.04 R4_Z-axis.2@3568.9,1574.8 ; C2_Y-axis.2@3661.42,602.36 3661.42,708.66 3668.46,715.7 ; C3_Y-axis.2@3661.42,874.02 3661.42,825.38 3671.38,815.42 3676.48,815.42 3700.79,791.11 3700.79,748.03 3668.46,715.7 ; C2_Z-axis.2@3661.42,2413.39 3673.23,2413.39 3781.66,2304.96 3781.66,2132.05 3673.23,2023.62 C9_Z-axis.2@3661.42,2023.62
  Bottom Layer w17: J1.2@433.07,2440.94 433.07,2389.76 463.94,2358.89 515.12,2358.89 566.93,2307.09 J1.2@566.93,2251.97 597.8,2221.1 699.96,2221.1 v1(761.53,2159.53) 584.73,2159.53 v1(511.81,2086.61) ; v1(590.55,1968.5) 629.92,1929.13 v1(731.69,1929.13) ; v1(708.66,1496.06) 885.83,1496.06 C6.2@1003.94,1614.17 ; C4_X-axis.2@1102.36,1948.82 964.57,1811.02 v1(886.28,1811.02) 886.28,1731.83 C6.2@1003.94,1614.17 ; v1(1303.34,1655.47) 1301.23,1655.47 1298.46,1658.23 1048,1658.23 C6.2@1003.94,1614.17 ; v1(1340.71,1417.32) 1349.64,1417.32 1361.45,1429.13 Q1_X-axis.PPAD@1583.66,1429.13 ; Q1_X-axis.PPAD@1759.84,1401.57 1825.39,1336.02 1825.39,1323.39 v1(1926.18,1222.6) 1970.63,1178.15 v1(1970.63,984.25) ; Q1_X-axis.PPAD@1759.84,1456.69 v1(1850.39,1456.69) ; *1.J25_14@1762.99,2440.94 *1.J25_12@1862.99,2440.94 1941.73,2519.68 2401.57,2519.68 2440.94,2480.32 2440.94,2254.05 2430.99,2244.09 1968.5,2244.09 v1(1889.76,2165.35) ; v1(1981.26,1535.43) 1981.26,1738.24 2005.74,1762.72 v1(2005.74,1771.65) ; v1(2307.09,1787.4) 2316.02,1787.4 2331.76,1771.65 C4_Z-axis.2@2598.43,1771.65 2521.59,1848.49 v1(2521.59,1966.6) ; v1(2440.94,1062.99) 2447.26,1056.68 2447.26,1017.31 C4_Y-axis.2@2519.68,944.88 ; v1(2519.68,2167.48) 2520.89,2166.28 2711.16,2166.28 v1(2712.37,2165.07) ; v1(2795.28,2185.04) 2970.47,2185.04 Q1_Z-axis.PPAD@2970.47,2082.68 ; v1(2834.65,2480.32) v1(3070.87,2480.32) ; Q1_Y-axis.PPAD@3050.2,814.96 3050.2,965.55 v1(3046.75,969) 3046.75,977.93 3073,1004.17 3073,1063.44 3107.94,1098.39 3131.28,1098.39 3135.25,1102.36 3186.85,1102.36 v1(3188.98,1104.49) ; v1@3084.48,1233.1 3111.19,1206.39 3141.63,1206.39 3166.92,1181.1 3258.06,1181.1 v1(3258.06,1171.44) ; v1(3084.87,208.52) 3200.64,208.52 v1(3228.35,236.22) ; Q1_Z-axis.PPAD@3324.8,2027.56 v1@3475.32,2027.56 ; v1(3501.81,1805.93) 3505.21,1805.93 3505.21,1710.96 3506.07,1710.1 3506.07,1614.1 3533.42,1586.74 v1(3533.42,1516.19)
HOME_X: *1.J2_7 Q1_X-axis.27 R7_X-axis.2 | length 2560.4
  Top Layer w17: v1(1338.58,1181.1) 1338.58,1299.21 1259.84,1377.95 1259.84,1743.11 1395.67,1878.94 ; R7_X-axis.2@1395.67,2086.61 1395.67,1878.94 ; Q1_X-axis.27@1442.91,1539.37 1443.5,1539.96 1443.5,1627.36 1395.67,1675.2 1395.67,1878.94
  Bottom Layer w17: v1(1338.58,1181.1) 1813.15,1181.1 1929.13,1065.12 1929.13,757.99 1939.09,748.03 2047.24,748.03 2112.88,682.39 2112.88,651.06 *1.J2_7@2122.99,640.94
HOME_Y: *1.J1_10 Q1_Y-axis.27 R7_Y-axis.2 | length 4129.3
  Top Layer w17: v1(984.25,352.2) 986.38,352.2 1067.25,271.33 1939.96,271.33 1977.2,234.09 2105.93,234.09 2186.8,314.96 2640.55,314.96 2824.49,498.9 2824.49,763.35 2703.78,884.07 2703.78,1050.23 v1(2755.91,1102.36) 2770.28,1102.36 2812.49,1060.15 ; R7_Y-axis.2@2379.92,1299.21 2379.92,1242.13 2401.57,1220.47 2637.8,1220.47 v1(2639.93,1222.6) ; 2817.46,1065.12 2954.35,1065.12 2964.09,1074.87 3048.69,1074.87 3077.61,1045.94 3077.61,1003.48 3088.25,992.84 3088.25,951.81 3087.6,951.15 Q1_Y-axis.27@3087.6,897.64
  Bottom Layer w17: v1(984.25,352.2) 1090.12,458.07 1280.12,458.07 *1.J1_10@1362.99,540.94 ; v1(2639.93,1222.6) 2755.91,1106.62 v1(2755.91,1102.36)
HOME_Z: *1.J1_15 Q1_Z-axis.27 R7_Z-axis.2 | length 7718.9
  Top Layer w17: v1(590.55,393.7) 590.55,335.01 846.82,78.74 3661.42,78.74 3893.9,311.22 3893.9,1359.46 v1(3856.14,1397.22) ; v1(1023.62,748.03) 1181.1,748.03 1220.47,787.4 1397.17,787.4 1409.93,800.16 v1(1411.16,800.16) ; Q1_Z-axis.27@3287.4,1944.88 3287.99,1944.29 3287.99,1914.12 3290,1912.12 3290,1906.85 3425.2,1771.65 R7_Z-axis.2@3425.2,1585.63 ; R7_Z-axis.2@3425.2,1574.8 R7_Z-axis.2@3425.2,1585.63 ; v1(3464.57,1692.91) 3464.57,1625 R7_Z-axis.2@3425.2,1585.63 ; v1(3661.42,1483.47) 3752.75,1574.8 3783.91,1574.8 3785.78,1576.68 3816.51,1576.68 3816.77,1576.93 3816.77,1588.82 v1(3818.9,1590.95)
  Bottom Layer w17: v1(590.55,393.7) 629.92,433.07 629.92,816.81 639.88,826.77 944.88,826.77 v1(1023.62,748.03) ; v1(1411.16,800.16) 1503.78,800.16 *1.J1_15@1662.99,640.94 ; v1(3464.57,1692.91) 3464.57,1526.35 3513.47,1477.45 3518.53,1477.45 3570.4,1425.59 3574.54,1429.72 3608.92,1429.72 3633.23,1405.41 3633.23,1402.95 3636.42,1402.95 3637.38,1401.99 3661.42,1426.04 v1(3661.42,1483.47) ; v1(3818.9,1590.95) 3856.14,1553.71 v1(3856.14,1397.22)